# Altium PCB буектополгия.PcbDoc
Units mm, origin at the board's own origin, x right, y up, seen from the top; angles counter-clockwise.
Board outline 101.6 x 71.12 mm, 2 copper layers (Top Layer, Bottom Layer); 52 components, 34 nets, 194 pads, 24 vias.
Unrouted connection lines stored in the file: 126.
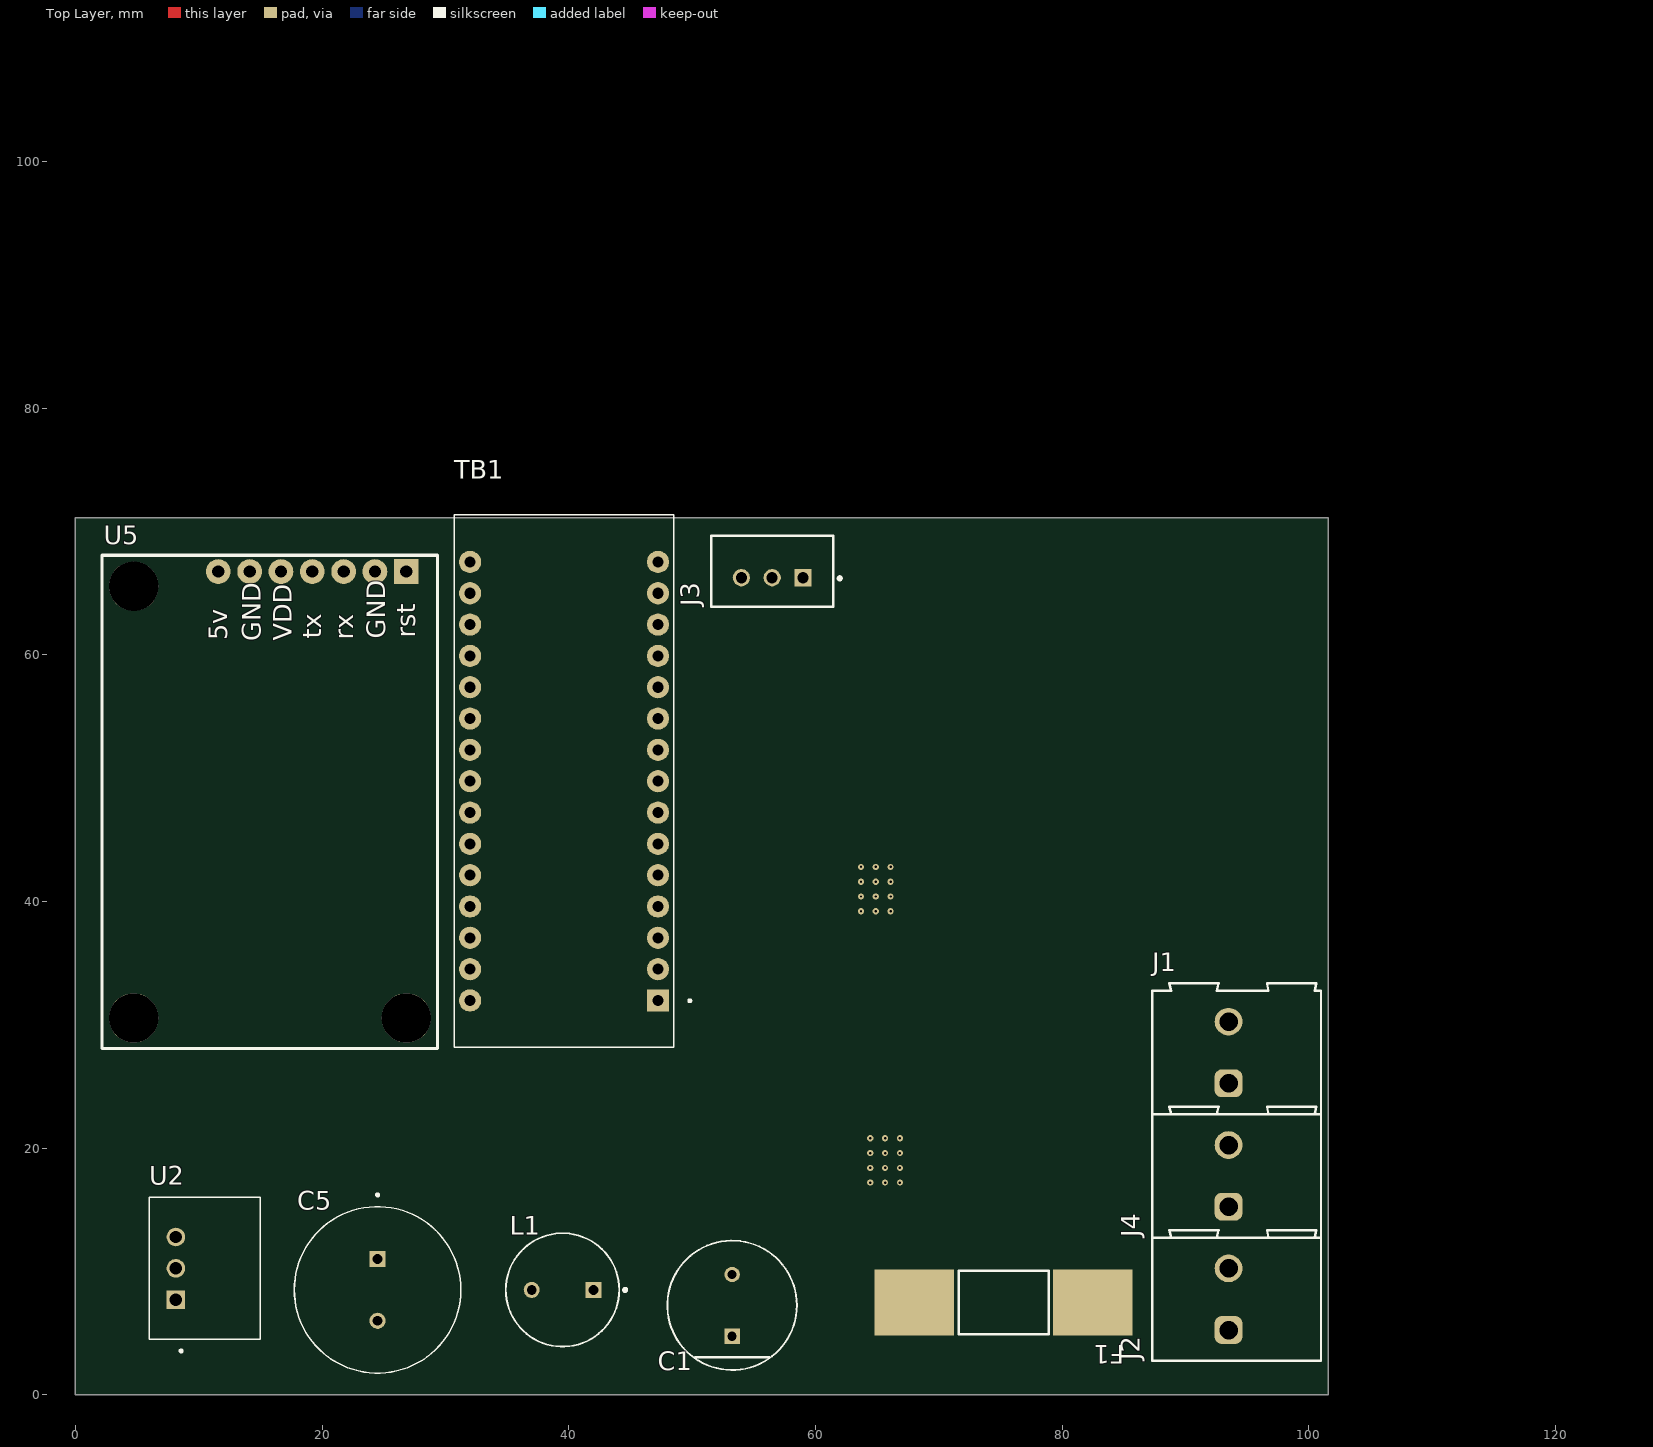
[diagram p0: Top Layer view]
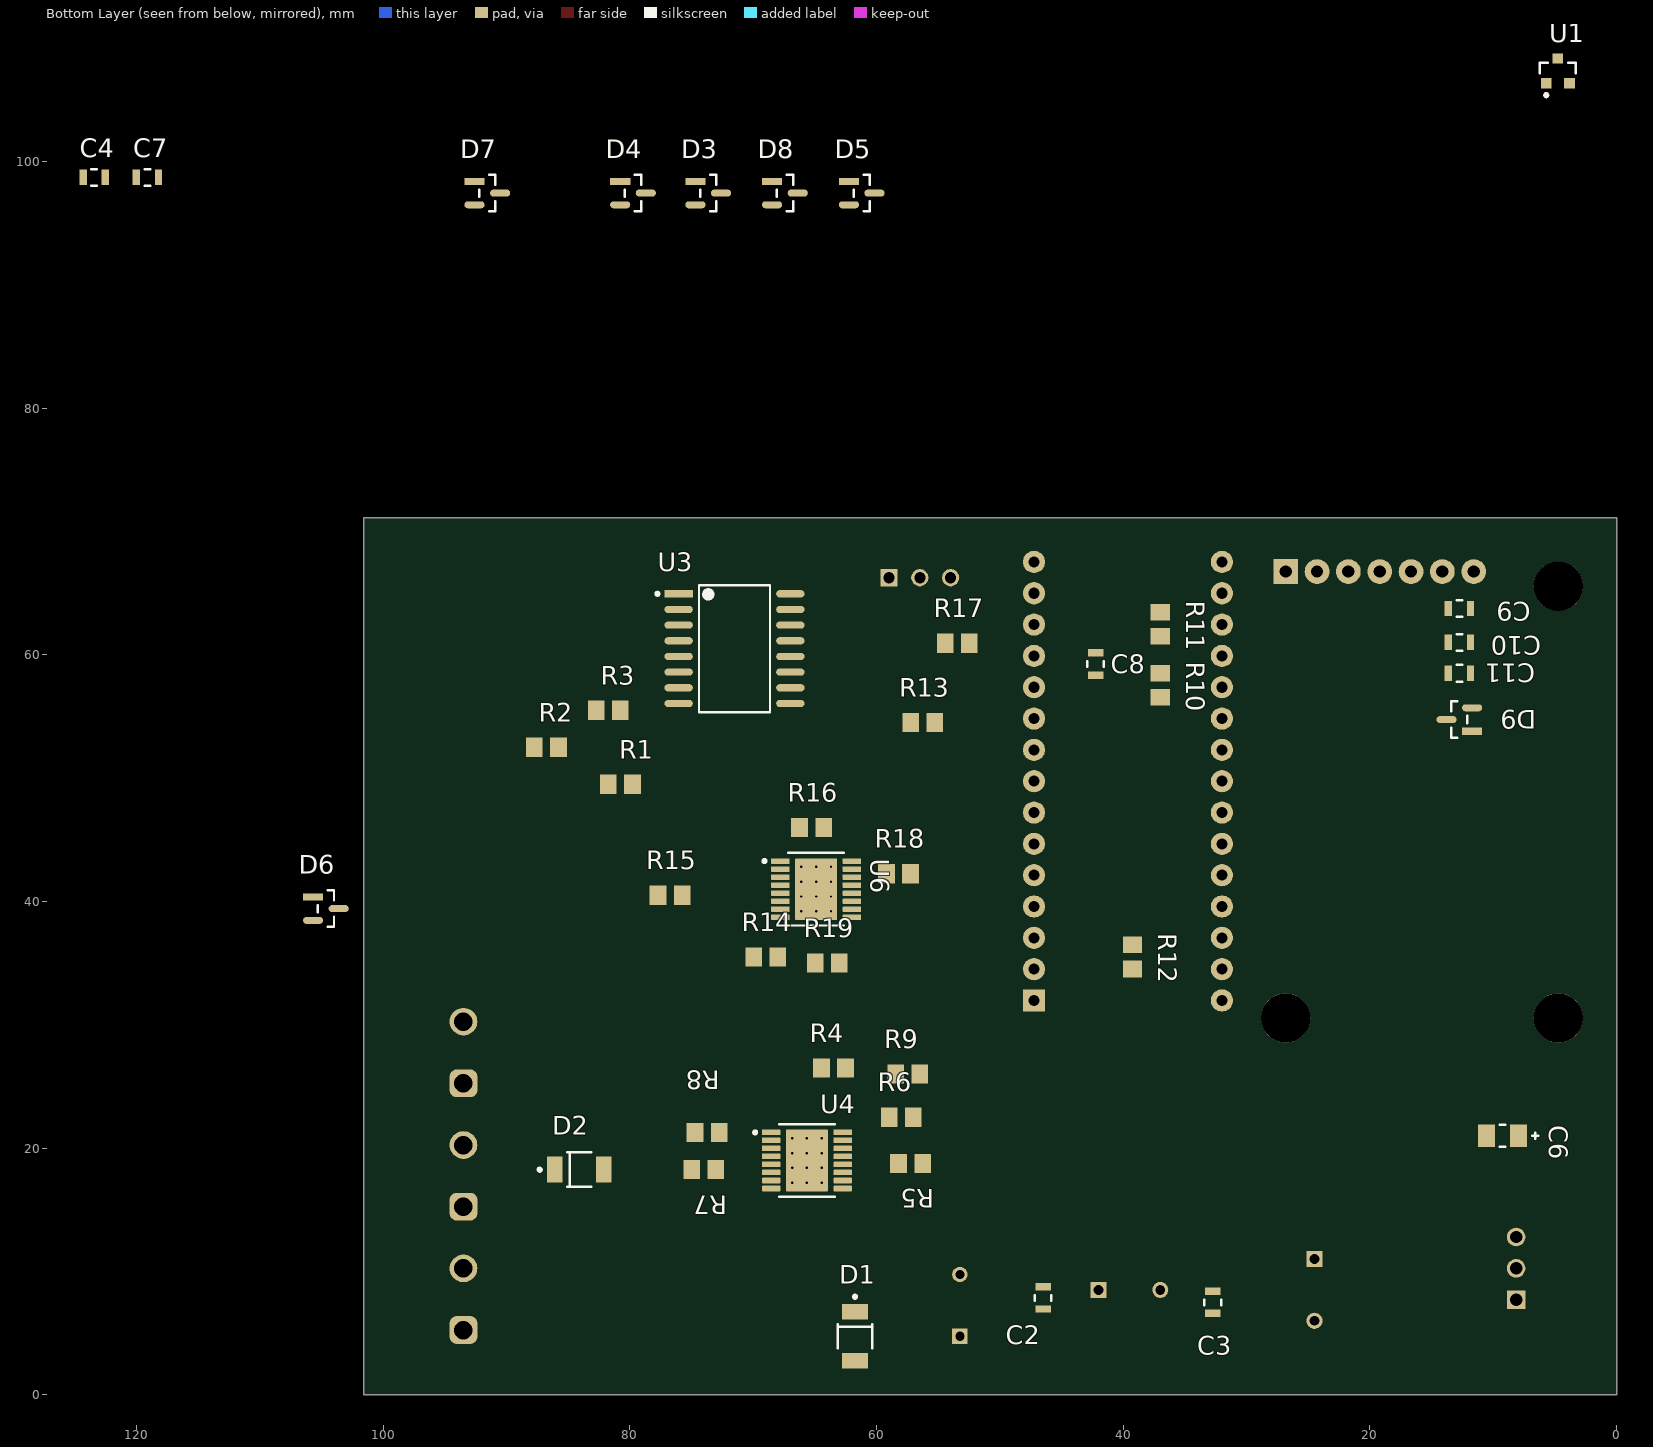
[diagram p1: Bottom Layer view, seen from below]

## Layer stack, top to bottom
Top Solder: solder mask 0.0102, Solder Resist, Dk 3.5
Top Layer: signal copper 0.0356
Dielectric 1: dielectric 0.32, FR-4, Dk 4.8
Bottom Layer: signal copper 0.0356
Bottom Solder: solder mask 0.0102, Solder Resist, Dk 3.5

## Board outline
0,0 0,71.12 101.6,71.12 101.6,0

## Design rules (kind name [scope] priority, off if disabled: settings)
Clearance [All] p1: gap=0.254 ignorepadtopadclearanceinfootprint=FALSE
PolygonConnect [All] p1: connectstyle=Relief reliefconductorwidth=0.254 reliefentries=4 polygonreliefangle="90 Angle" airgapwidth=0.254
RoutingVias [All] p1: holewidth=0.711 width=1.27 viastyle="Through Hole" minholewidth=0.711 minwidth=1.27 maxholewidth=0.711 maxwidth=1.27
SolderMaskExpansion [All] p1: expansion=0.102 istentingtop=FALSE
Width [All] p1: maxlimit=0.254 minlimit=0.254 preferedwidth=0.254
30 further rules are at their usual default settings.

## Components (designator, comment, footprint, x,y, rotation, side; value= is the part's Value field where it differs from the comment)
C1 "250PX33MEFC10X20" FP-250PX33MEFC10X20-MFG 53.25,7.25 r90 top
C2 "GRM21BR61C106KE15L" FP-GRM21B-0_1-MFG 46.5,7.85 r270 bottom
C3 "GRM21BR61C106KE15L" FP-GRM21B-0_1-MFG 32.75,7.5 r270 bottom
C4 "GRM21BR61C106KE15L" FP-GRM21B-0_1-MFG 123.444,98.708 r180 bottom
C5 "UBT1H331MHD8" CAPPRD500W60D1350H2200 24.5,8.5 r270 top value=680uF
C6 "TAJA226M006RNJ" FP-TAJA-MFG 9.25,21 r180 bottom
C7 "GRM21BR61C106KE15L" FP-GRM21B-0_1-MFG 119.126,98.708 r180 bottom
C8 "GRM21BR61C106KE15L" FP-GRM21B-0_1-MFG 42.25,59.25 r90 bottom
C9 "GRM21BR61C106KE15L" FP-GRM21B-0_1-MFG 12.75,63.75 r0 bottom
C10 "GRM21BR61C106KE15L" FP-GRM21B-0_1-MFG 12.75,61 r0 bottom
C11 "GRM21BR61C106KE15L" FP-GRM21B-0_1-MFG 12.75,58.5 r0 bottom
D1 "SMAJ15A" FP-SMA-MFG 61.75,4.75 r270 bottom
D2 "SMAJ12A" FP-SMA-MFG 84.12,18.25 r180 bottom
D3 "PESD5V2S2UT" FP-6_541-5014_01-4-IPC_A 73.66,97.438 r180 bottom value=35pF
D4 "PESD5V2S2UT" FP-6_541-5014_01-4-IPC_A 79.756,97.438 r180 bottom value=35pF
D5 "PESD5V2S2UT" FP-6_541-5014_01-4-IPC_A 61.214,97.438 r180 bottom value=35pF
D6 "PESD5V2S2UT" FP-6_541-5014_01-4-IPC_A 104.657,39.416 r180 bottom value=35pF
D7 "PESD5V2S2UT" FP-6_541-5014_01-4-IPC_A 91.567,97.438 r180 bottom value=35pF
D8 "PESD5V2S2UT" FP-6_541-5014_01-4-IPC_A 67.437,97.438 r180 bottom value=35pF
D9 "PESD5V2S2UT" FP-6_541-5014_01-4-IPC_A 12.75,54.75 r0 bottom value=35pF
F1 "021502.5MXP" LFUS-0215-20X5_L 75.26,7.493 r0 top
J1 "691211720002" 691211720002 94.15,27.75 r90 top
J2 "KSE-103-5.0-02P" 691211720002 94.15,7.75 r90 top
J3 "B3B-XH-A(LF)(SN)" FP-B3B-XH-A_LF_SN-MFG 56.5,66.775 r180 top
J4 "691211720002" 691211720002 94.15,17.75 r90 top
L1 "RLB0914-220KL" FP-RLB0914-MFG 39.5,8.5 r180 top
R1 "ERJ-6ENF1001V" RESC2013X70X40ML20T20 80.775,49.5 r0 bottom
R2 "ERJ-6ENF1001V" RESC2013X70X40ML20T20 86.775,52.5 r180 bottom
R3 "ERJ-6ENF1001V" RESC2013X70X40ML20T20 81.75,55.5 r180 bottom
R4 "ERJ-6ENF1001V" RESC2013X70X40ML20T20 63.5,26.5 r180 bottom
R5 "ERJ-6ENF1001V" RESC2013X70X40ML20T20 57.25,18.75 r0 bottom
R6 "ERJ-6ENF1001V" RESC2013X70X40ML20T20 58,22.5 r180 bottom
R7 "ERJ-6ENF1001V" RESC2013X70X40ML20T20 74.025,18.25 r0 bottom
R8 "ERJ-6ENF1001V" RESC2013X70X40ML20T20 73.75,21.25 r0 bottom
R9 "ERJ-6ENF1001V" RESC2013X70X40ML20T20 57.475,26 r180 bottom
R10 "ERJ-6ENF1001V" RESC2013X70X40ML20T20 37,57.525 r270 bottom
R11 "ERJ-6ENF1001V" RESC2013X70X40ML20T20 37,62.475 r270 bottom
R12 "ERJ-6ENF1001V" RESC2013X70X40ML20T20 39.25,35.5 r270 bottom
R13 "ERJ-6ENF1001V" RESC2013X70X40ML20T20 56.25,54.5 r180 bottom
R14 "ERJ-6ENF1001V" RESC2013X70X40ML20T20 69,35.5 r180 bottom
R15 "ERJ-6ENF1001V" RESC2013X70X40ML20T20 76.75,40.5 r180 bottom
R16 "ERJ-6ENF1001V" RESC2013X70X40ML20T20 65.275,46 r180 bottom
R17 "ERJ-6ENF1001V" RESC2013X70X40ML20T20 53.457,60.935 r180 bottom
R18 "ERJ-6ENF1001V" RESC2013X70X40ML20T20 58.225,42.25 r180 bottom
R19 "ERJ-6ENF1001V" RESC2013X70X40ML20T20 64,35 r180 bottom
TB1 "ARDUINO_NANO" SHIELD_ARDUINO_NANO 39.62,49.75 r180 top
U1 "PSM712-LF-T7" PRKT-SOT23-3_V 4.763,107.344 r90 bottom
U2 "P7805-500" CONV_P7805-500 10.5,10.25 r90 top
U3 "ADM2484EBRWZ-REEL7" FP-RW-16-IPC_B 71.525,60.5 r180 bottom
U4 "TPS1HB50-Q1" FP-PWP0016H-MFG 65.65,19 r180 bottom
U5 "sim800l" PCBComponent_1 26.83,30.555 r90 top
U6 "TPS1HB50-Q1" FP-PWP0016H-MFG 64.9,41 r180 bottom

## Footprints (in the part's own frame and the unit in brackets; to place one, negate y for a bottom-side part, rotate by r counter-clockwise, add the part's x,y. Pads: shape width x height; smd on the part's side, far side on the other; paste and mask are expansions set on the pad)
691211720002 [mm] "5,00mm - modular - green -45Ўг entry with rising cage clamp - 02p"
  rrect50% 2.25x2.25 hole 1.5: 1(-2.5,0.65)
  round 2.25 hole 1.5: 2(2.5,0.65)
  silkscreen extent -5,-6.85 5.6,6.85, body extent -5,-6.85 5.6,6.85, height 15.72
CAPPRD500W60D1350H2200 [mm]
  round 1.308 hole 0.8: N(2.5,0)
  rect 1.308x1.308 / inner round 1.308 / far side rect 1.308x1.308 hole 0.8: P(-2.5,0)
  silkscreen extent -7.8,-6.75 6.75,6.75, body extent -6.5,-6.25 6,6.25, height 22
CONV_P7805-500 [mm]
  rect 1.508x1.508 hole 1: 1(-2.54,2.35)
  round 1.508 hole 1: 2(0,2.35) 3(2.54,2.35)
  silkscreen extent -6.8,-4.5 5.75,4.5, body extent -5.71,-4.5 5.79,4.5, height 17.53
FP-6_541-5014_01-4-IPC_A [mm]
  rect 1.633x0.572 smd paste+0 mask+0: 1(-1.038,0.95)
  rrect100% 1.633x0.572 smd paste+0 mask+0: 2(-1.038,-0.95) 3(1.038,0)
  silkscreen extent -0.66,-1.48 0.66,1.48, body extent -1.24,-1.48 1.24,1.48, height 1.15
FP-250PX33MEFC10X20-MFG [mm]
  rect 1.25x1.25 hole 0.75 paste-2539.97 mask+0: 1(-2.5,0)
  round 1.25 hole 0.75 paste-2539.97 mask+0: 2(2.5,0)
  silkscreen extent -5.25,-5.25 5.25,5.25, body extent -5.35,-5.35 5.35,5.35, height 0.25
FP-B3B-XH-A_LF_SN-MFG [mm]
  rect 1.4x1.4 hole 0.9 paste-2539.97 mask+0: 1(-2.5,0.525)
  round 1.4 hole 0.9 paste-2539.97 mask+0: 2(0,0.525) 3(2.5,0.525)
  silkscreen extent -5.6,-2.88 4.95,2.88, body extent -5.05,-2.98 5.05,2.98, height 0.25
FP-GRM21B-0_1-MFG [mm]
  rect 0.6x1.25 smd paste+0 mask+0: 1(-0.9,0) 2(0.9,0)
  silkscreen extent -0.23,-0.67 0.23,0.67, body extent -1,-0.63 1,0.63, height 1.35
FP-PWP0016H-MFG [mm]
  rrect22% 1.5x0.45 smd paste+0 mask+0: 1(-2.9,2.275) 2(-2.9,1.625) 3(-2.9,0.975) 4(-2.9,0.325) 5(-2.9,-0.325) 6(-2.9,-0.975) 7(-2.9,-1.625) 8(-2.9,-2.275) 9(2.9,-2.275) 10(2.9,-1.625) 11(2.9,-0.975) 12(2.9,-0.325) 13(2.9,0.325) 14(2.9,0.975) 15(2.9,1.625) 16(2.9,2.275)
  rrect3% 3.4x5 smd paste-1000 mask-1000: 17(0,0)
  silkscreen extent -4.33,-2.95 2.25,2.95, body extent -3.2,-2.5 3.2,2.5, height 1.2
FP-RLB0914-MFG [mm]
  rect 1.3x1.3 hole 0.8 paste-2539.97 mask+0: 1(-2.5,0)
  round 1.3 hole 0.8 paste-2539.97 mask+0: 2(2.5,0)
  silkscreen extent -5.2,-4.6 4.6,4.6, body extent -4.7,-4.7 4.7,4.7, height 0.25
FP-RW-16-IPC_B [mm]
  rect 2.298x0.582 smd paste+0 mask+0: 1(-4.528,4.445)
  rrect100% 2.298x0.582 smd paste+0 mask+0: 2(-4.528,3.175) 3(-4.528,1.905) 4(-4.528,0.635) 5(-4.528,-0.635) 6(-4.528,-1.905) 7(-4.528,-3.175) 8(-4.528,-4.445) 9(4.528,-4.445) 10(4.528,-3.175) 11(4.528,-1.905) 12(4.528,-0.635) 13(4.528,0.635) 14(4.528,1.905) 15(4.528,3.175) 16(4.528,4.445)
  silkscreen extent -6.38,-5.15 2.88,5.15, body extent -5.18,-5.15 5.18,5.15, height 2.65
FP-SMA-MFG [mm]
  rect 1.27x2.1 smd paste+0 mask+0: 1(-1.985,0) 2(1.985,0)
  silkscreen extent -3.32,-1.4 0.97,1.4, body extent -2.61,-1.3 2.61,1.3, height 2.62
FP-TAJA-MFG [mm]
  rect 1.4x1.8 smd paste+0 mask+0: 1(-1.3,0) 2(1.3,0)
  silkscreen extent -0.23,-0.9 2.9,0.9, body extent -1.6,-0.8 1.6,0.8, height 1.8
LFUS-0215-20X5_L [mm] "MELF Resistor, 2-Leads, Body 20.5x5.3mm, IPC High Density"
  rect 6.45x5.35 smd: 1(-7.25,0) 2(7.25,0)
  silkscreen extent -3.65,-2.57 3.65,2.58, body extent -10,-2.58 10,2.58, height 5.15
PCBComponent_1 [mm]
  rect 2x2 hole 1: 1(36.195,0)
  round 2 hole 1: 2(36.195,2.54) 3(36.195,5.08) 4(36.195,7.62) 5(36.195,10.16) 6(36.195,12.7) 7(36.195,15.24)
  round 4 hole 4 unplated: 8(0,22.1) 8(0,0) 8(35,22.1)
  silkscreen extent -2.49,-2.54 37.51,24.66, body extent -2.54,-2.55 37.46,24.63, height 11
PRKT-SOT23-3_V [mm] "SOT23, 3-Leads, Body 2.92x1.3mm, Pitch 0.94mm"
  rect 0.84x0.84 smd: 1(-1,0.94) 3(1,0)
  rect 0.84x0.9 smd: 2(-1,-0.94)
  silkscreen extent -2.09,-1.46 0.65,1.46, body extent -0.65,-1.46 0.65,1.46, height 1.17
RESC2013X70X40ML20T20 [mm] "Chip Resistor, 2-Leads, Body 2.00x1.25mm, IPC Low Density"
  rect 1.35x1.55 smd: 1(-0.975,0) 2(0.975,0)
  body extent -1.1,-0.72 1.1,0.72, height 0.7
SHIELD_ARDUINO_NANO [mm]
  rect 1.8x1.8 / inner round 1.8 / far side rect 1.8x1.8 hole 0.9: 1(-7.62,17.78)
  round 1.8 hole 0.9: 2(-7.62,15.24) 3(-7.62,12.7) 4(-7.62,10.16) 5(-7.62,7.62) 6(-7.62,5.08) 7(-7.62,2.54) 8(-7.62,0) 9(-7.62,-2.54) 10(-7.62,-5.08) 11(-7.62,-7.62) 12(-7.62,-10.16) 13(-7.62,-12.7) 14(-7.62,-15.24) 15(-7.62,-17.78) 16(7.62,-17.78) 17(7.62,-15.24) 18(7.62,-12.7) 19(7.62,-10.16) 20(7.62,-7.62) 21(7.62,-5.08) 22(7.62,-2.54) 23(7.62,0) 24(7.62,2.54) 25(7.62,5.08) 26(7.62,7.62) 27(7.62,10.16) 28(7.62,12.7) 29(7.62,15.24) 30(7.62,17.78)
  silkscreen extent -10.3,-21.59 8.89,21.59, body extent -9,-21.6 9,23.4, height 12.6

## Part data
C1: library part CMP-01474-19991556-1, "250PX33MEFC10X20 Radial Can ALUMINUM ELECTROLYTIC CAPACITOR PX 250V 33muF ±20% 0.394Dia 10.00mm", Capacitance=100uF, Case/Package=Radial, Max Operating Temperature=105°C, Min Operating Temperature=-40°C, Ripple Current=140mA, Tolerance=20%, Voltage Rating=250V, Diameter=10mm, Dissipation Factor=20%, Height=20mm, Height - Seated (Max)=21.9964mm, Lead Pitch=5.0038mm, Length=63.5mm, Life (Hours)=2000hours, Mount="Through Hole", NexarPartId=19991556, Number of Pins=2, REACH SVHC="No SVHC", Ripple Current (AC)=140mA, RoHS=Compliant, Voltage Rating (DC)=250V, Weight=4.717361g, Width=19.05mm
C2 C3: library part CMP-2007-03453-2, "Chip Multilayer Ceramic Capacitors for General Purpose, 0805, 10uF, X5R, 15%, 10%, 16V", Capacitance=10uF, Case Code (Imperial)=0805, Case Code (Metric)=2012, Dielectric=X5R, Max Operating Temperature=85°C, Min Operating Temperature=-55°C, Package Quantity=1, Tolerance=10%, Voltage=16V, Case/Package=0805, Depth=1.25mm, Height=1.25mm, Lead Free="Lead Free", Length=2mm, Material=Ceramic, Mount="Surface Mount", Packaging="Tape and Reel", Radiation Hardening=No, REACH SVHC="No SVHC", Termination=SMD/SMT, Thickness=0.053inch, Voltage Rating=16V, Voltage Rating (DC)=16V, Width=1.25mm
C4 C7 C11: library part CMP-2007-03453-2, "Chip Multilayer Ceramic Capacitors for General Purpose, 0805, 0.1uF, X5R, 15%, 10%, 16V", Capacitance=0.1uF, Case Code (Imperial)=0805, Case Code (Metric)=2012, Dielectric=X5R, Max Operating Temperature=85°C, Min Operating Temperature=-55°C, Package Quantity=1, Tolerance=10%, Voltage=16V, Case/Package=0805, Depth=1.25mm, Height=1.25mm, Lead Free="Lead Free", Length=2mm, Material=Ceramic, Mount="Surface Mount", Packaging="Tape and Reel", Radiation Hardening=No, REACH SVHC="No SVHC", Termination=SMD/SMT, Thickness=0.053inch, Voltage Rating=16V, Voltage Rating (DC)=16V, Width=1.25mm
C5: "330 ÂµF 50 V Aluminum Electrolytic Capacitors Radial, Can - 10000 Hrs @ 125Â°C", Package="Radial Nichicon", Availability="In Stock", Check_prices=https://www.snapeda.com/parts/UBT1H331MHD8/Nichicon/view-part/?ref=eda, MF=Nichicon, MP=UBT1H331MHD8, PRICE=None, Purchase-URL=https://pricing.snapeda.com/search/part/UBT1H331MHD8/?ref=eda, SnapEDA_Link=https://www.snapeda.com/parts/UBT1H331MHD8/Nichicon/view-part/?ref=snap
C6: library part CMP-04424-000650-1, "22uF 6.3V  ±20% 3Ω 1206  SMD Tantalum Capacitor", Capacitance=22uF, Case Code (Imperial)=1206, Case Code (Metric)=3216, ESR (Equivalent Series Resistance)=3R, Leakage Current=1.4uA, Max Operating Temperature=125°C, Min Operating Temperature=-55°C, Package Quantity=1, Tolerance=20%, Voltage Rating=6.3V, Case/Package=1206, Construction=Flat, Depth=1.6mm, Dissipation Factor=6%, Features="General Purpose", Height=1.8mm, Height - Seated (Max)=0.071inch, Lead Free="Lead Free", Length=3.2mm, Mount="Surface Mount", Number of Pins=2, Packaging="Tape and Reel", Polarity=Polar, Radiation Hardening=No, REACH SVHC="No SVHC", RoHS Compliant=Yes, Series=TAJ, Termination=SMD/SMT, Voltage Rating (DC)=6.3V, Width=1.6mm
C8: library part CMP-2007-03453-2, "Chip Multilayer Ceramic Capacitors for General Purpose, 0805, 10uF, X5R, 15%, 10%, 16V", Capacitance=1uF, Case Code (Imperial)=0805, Case Code (Metric)=2012, Dielectric=X5R, Max Operating Temperature=85°C, Min Operating Temperature=-55°C, Package Quantity=1, Tolerance=10%, Voltage=16V, Case/Package=0805, Depth=1.25mm, Height=1.25mm, Lead Free="Lead Free", Length=2mm, Material=Ceramic, Mount="Surface Mount", Packaging="Tape and Reel", Radiation Hardening=No, REACH SVHC="No SVHC", Termination=SMD/SMT, Thickness=0.053inch, Voltage Rating=16V, Voltage Rating (DC)=16V, Width=1.25mm
C9: library part CMP-2007-03453-2, "Chip Multilayer Ceramic Capacitors for General Purpose, 0805, 10uF, X5R, 15%, 10%, 16V", Capacitance=33pF, Case Code (Imperial)=0805, Case Code (Metric)=2012, Dielectric=X5R, Max Operating Temperature=85°C, Min Operating Temperature=-55°C, Package Quantity=1, Tolerance=10%, Voltage=16V, Case/Package=0805, Depth=1.25mm, Height=1.25mm, Lead Free="Lead Free", Length=2mm, Material=Ceramic, Mount="Surface Mount", Packaging="Tape and Reel", Radiation Hardening=No, REACH SVHC="No SVHC", Termination=SMD/SMT, Thickness=0.053inch, Voltage Rating=16V, Voltage Rating (DC)=16V, Width=1.25mm
C10: library part CMP-2007-03453-2, "Chip Multilayer Ceramic Capacitors for General Purpose, 0805, 10uF, X5R, 15%, 10%, 16V", Capacitance=10pF, Case Code (Imperial)=0805, Case Code (Metric)=2012, Dielectric=X5R, Max Operating Temperature=85°C, Min Operating Temperature=-55°C, Package Quantity=1, Tolerance=10%, Voltage=16V, Case/Package=0805, Depth=1.25mm, Height=1.25mm, Lead Free="Lead Free", Length=2mm, Material=Ceramic, Mount="Surface Mount", Packaging="Tape and Reel", Radiation Hardening=No, REACH SVHC="No SVHC", Termination=SMD/SMT, Thickness=0.053inch, Voltage Rating=16V, Voltage Rating (DC)=16V, Width=1.25mm
D1: library part CMP-07401-000026-1, "TVS DIODE 15V 24.4V SMA", Breakdown Voltage=16.7V, Clamping Voltage=24.4V, Manufacturer="Bourns Inc.", Max Junction Temp=+150°C, Package=SMA, Peak Pulse Current=16.4A, Peak Pulse Power=400W, Reverse Standoff Voltage=15V, Temperature="-55°C to +150°C", Temperature Range Low=-55°C, Automotive=No, Category=Diode, ComponentLink2Description=Datasheet, ComponentLink2URL=https://www.bourns.com/docs/Product-Datasheets/SMAJ.pdf, Device Class L1="Circuit Protection", Device Class L2="TVS Diodes", Device Class L3=unset, Digikey Description="TVS DIODE 15V 24.4V SMA", Direction=Unidirectional, Height=2.29mm, Lead Free=Yes, Manufacturer Part Number=SMAJ15A, Mouser Description="Bourns Smaj15a / Diode Tvs 15v 400w Uni 5% Smd Bourns", Number of Channels=1, Octopart=https://octopart.com/smaj15a-bourns-12809353, RoHS=TRUE, Temperature Range High=+150°C
D2: library part CMP-07401-000026-1, "TVS DIODE 15V 24.4V SMA", Breakdown Voltage=16.7V, Clamping Voltage=24.4V, Manufacturer="Bourns Inc.", Manufacturer Part Number=SMAJ15A, Max Junction Temp=+150°C, Package=SMA, Peak Pulse Current=16.4A, Peak Pulse Power=400W, Reverse Standoff Voltage=15V, Temperature="-55°C to +150°C", Temperature Range Low=-55°C, Automotive=No, Category=Diode, ComponentLink2Description=Datasheet, ComponentLink2URL=https://www.bourns.com/docs/Product-Datasheets/SMAJ.pdf, Device Class L1="Circuit Protection", Device Class L2="TVS Diodes", Device Class L3=unset, Digikey Description="TVS DIODE 15V 24.4V SMA", Direction=Unidirectional, Height=2.29mm, Lead Free=Yes, Mouser Description="Bourns Smaj15a / Diode Tvs 15v 400w Uni 5% Smd Bourns", Number of Channels=1, Octopart=https://octopart.com/smaj15a-bourns-12809353, RoHS=TRUE, Temperature Range High=+150°C
D3 D4 D5 D6 D7 D8 D9: library part CMP-02577-000002-1, "TVS DIODE 5V  SOT23-3", Breakdown Voltage=16.5V, Capacitance=35pF, Clamping Voltage=24.8V, Manufacturer=Vishay, Manufacturer Part Number=GSOT15C-E3-08, Max Junction Temp=+150°C, Package=6.541-5014.01-4, Peak Pulse Current=8A, Peak Pulse Power=345W, Reverse Standoff Voltage=15V, Temperature="-55°C to +150°C", Temperature Range Low=-55°C, Automotive=Yes, Automotive Grade="Grade 0", Category=Diode, ComponentLink2Description=Datasheet, ComponentLink2URL=http://www.vishay.com/docs/85824/gsot03c.pdf, Device Class L1="Circuit Protection", Device Class L2="TVS Diodes", Device Class L3=unset, Digikey Description="TVS DIODE 15V 28.8V SOT23-3", Direction=Unidirectional, Height=1.15mm, Lead Free=Yes, Mouser Description="GSOT15C Series 12.3 V 120 pF SMT Bi-Directional ESD Protection Diode - SOT-23", Number of Channels=2, Octopart=https://octopart.com/gsot15c-e3-08-vishay-46467627, RoHS=TRUE, Temperature Range High=+150°C
F1: library part CMP-2000-05620-1, "Time-Lag Type Cartridge Fuse, 1 A, 0.00386 Ohm, 250 V, -55 to 125 degC, 2-Pin SMD, RoHS, Bulk d5*20", Current Rating=1A, Manufacturer=Littelfuse, Operating Temp Range=-55to+125°C, Package Description="2-Pin Surface Mount Device, Body 20 x 5.15 mm", Package Reference=0215-20X5, Working Voltage-Max=250V, Datasheet URL=http://www.littelfuse.com/~/media/electronics/datasheets/fuses/littelfuse_fuse_215_datasheet.pdf.pdf, Datasheet Version=05/2016, Manufacturer URL=http://www.littelfuse.com/, Mounting Technology=SurfaceMount, Response Characteristic=TimeLag, Size=5x20mm
J1 J2 J4: library part CMP-1502-02524-2, Color=Green, Current=10A, Max Operating Temperature=105°C, Min Operating Temperature=-40°C, Voltage=300V, Connector Type="PCB, Terminal Block", Contact Material=Brass, Contact Plating=Tin, Height=15.5mm, Housing Material=Nylon, Lead Pitch=5mm, Length=13.7mm, Mount="Through Hole", NexarPartId=8917714, Number of Contacts=2, Number of Levels=1, Number of Pins=2, Number of Positions Per Level=2, Packaging=Box, Pitch=5.0038mm, Plating="Brass, Steel", REACH SVHC=Unknown, RoHS=Compliant, Stripping Length=-7mm, Termination=Screw, Width=10mm, Wire Gauge (Max)=24AWG, Wire Gauge (Min)=12AWG, Wire/Cable Gauge=12AWG
J3: library part CMP-17439-000014-3, "CONN HEADER VERT 3POS 2.5MM", Color=Natural, Contact Resistance=20mR, Current Rating=3A, Flammability Rating="UL94 V-0", Housing Color=White, Insulation Resistance=1GR, Max Operating Temperature=85°C, Max Voltage Rating (AC)=250V, Min Operating Temperature=-25°C, Connector Type=Header, Contact Finish - Mating=TIN, Contact Material=Brass, Contact Plating=Tin, Contact Shape=Square, Contact Type="Male Pin", Depth=5.75mm, Fastening Type=Detent, Gender=Male, Housing Material=Polyamide, Insulation Color=Natural, Insulation Material=Nylon, Lead Free="Lead Free", Lead Pitch=2.5mm, Length=9.9mm, Max Current Rating=3A, Max Voltage Rating (DC)=250V, Mount="Through Hole", Number of Contacts=3, Number of Positions=3, Number of Rows=1, Orientation=Straight, Packaging=Bulk, Pitch=2.5mm, REACH SVHC="No SVHC", Series=XH, Termination=Solder, Voltage Rating=250V, Voltage Rating (AC)=250V, Wire/Cable Gauge=22AWG
L1: library part CMP-07248-000080-1, "FIXED IND 22UH 1.9A 90 MOHM TH", Case/Package=Radial, Current Rating=1A, DC Resistance (DCR)=280mR, Inductance=22uH, Inductance Tolerance=10%, Max Operating Temperature=105°C, Min Operating Temperature=-20°C, Package Quantity=200, Resistor Type=Wirewound, Self Resonant Frequency=3.5MHz, Test Frequency=796kHz, Core Material=Ferrite, DC Current=1A, Diameter=8.7mm, Height=12mm, Height - Seated (Max)=0.512inch, Lead Diameter=0.65mm, Lead Pitch=5mm, Lead/Base Style=Radial, Length=12mm, Material=Steel, Max DC Current=1A, Military Standard=Not, Mount="Through Hole", Orientation=Vertical, Packaging=Bulk, Q Factor=30, Radiation Hardening=No, REACH SVHC="No SVHC", Resistance=280mR, RMS Current (Irms)=1A, Series=RLB, Shielding=Unshielded, Termination=Radial, Tolerance=10%
R1 R2: library part CMP-2001-04375-5, "Chip Resistor, 12 Ohm, +/- 1%, 0.125 W, -55 to 155 degC, 0805 (2012 Metric), RoHS, Tape and Reel", Manufacturer=Panasonic, Max Operating Temperature="155 degC", Min Operating Temperature="-55 degC", Package Quantity=1, Resistance="12 Ом", Voltage Rating="150 V", ComponentLink1Description="Manufacturer URL", ComponentLink1URL=http://www.panasonic.com/, ComponentLink2Description=Datasheet, ComponentLink2URL=http://industrial.panasonic.com/cdbs/www-data/pdf/RDA0000/AOA0000C86.pdf, DatasheetVersion=04/2015, Height="0.6 mm", Length="2 mm", Mount="Surface Mount", Mounting Technology="Surface Mount", PackageDescription="2-Pin Surface Mount Device, Body 2 x 1.25 mm", PackageReference=0805, Packaging="Cut Tape", REACH SVHC=Yes
R3: library part CMP-2001-04375-5, "Chip Resistor, 120Ohm, +/- 1%, 0.125 W, -55 to 155 degC, 0805 (2012 Metric), RoHS, Tape and Reel", Manufacturer=Panasonic, Max Operating Temperature="155 degC", Min Operating Temperature="-55 degC", Package Quantity=1, Resistance="120 Ом", Voltage Rating="150 V", ComponentLink1Description="Manufacturer URL", ComponentLink1URL=http://www.panasonic.com/, ComponentLink2Description=Datasheet, ComponentLink2URL=http://industrial.panasonic.com/cdbs/www-data/pdf/RDA0000/AOA0000C86.pdf, DatasheetVersion=04/2015, Height="0.6 mm", Length="2 mm", Mount="Surface Mount", Mounting Technology="Surface Mount", PackageDescription="2-Pin Surface Mount Device, Body 2 x 1.25 mm", PackageReference=0805, Packaging="Cut Tape", REACH SVHC=Yes
R4 R18: library part CMP-2001-04375-5, "Chip Resistor, 12 Ohm, +/- 1%, 0.125 W, -55 to 155 degC, 0805 (2012 Metric), RoHS, Tape and Reel", Manufacturer=Panasonic, Max Operating Temperature="155 degC", Min Operating Temperature="-55 degC", Package Quantity=1, Resistance="1 кОм", Voltage Rating="150 V", ComponentLink1Description="Manufacturer URL", ComponentLink1URL=http://www.panasonic.com/, ComponentLink2Description=Datasheet, ComponentLink2URL=http://industrial.panasonic.com/cdbs/www-data/pdf/RDA0000/AOA0000C86.pdf, DatasheetVersion=04/2015, Height="0.6 mm", Length="2 mm", Mount="Surface Mount", Mounting Technology="Surface Mount", PackageDescription="2-Pin Surface Mount Device, Body 2 x 1.25 mm", PackageReference=0805, Packaging="Cut Tape", REACH SVHC=Yes
R5: library part CMP-2001-04375-5, "Chip Resistor, 12 Ohm, +/- 1%, 0.125 W, -55 to 155 degC, 0805 (2012 Metric), RoHS, Tape and Reel", Manufacturer=Panasonic, Max Operating Temperature="155 degC", Min Operating Temperature="-55 degC", Package Quantity=1, Resistance="47 кОм", Voltage Rating="150 V", ComponentLink1Description="Manufacturer URL", ComponentLink1URL=http://www.panasonic.com/, ComponentLink2Description=Datasheet, ComponentLink2URL=http://industrial.panasonic.com/cdbs/www-data/pdf/RDA0000/AOA0000C86.pdf, DatasheetVersion=04/2015, Height="0.6 mm", Length="2 mm", Mount="Surface Mount", Mounting Technology="Surface Mount", PackageDescription="2-Pin Surface Mount Device, Body 2 x 1.25 mm", PackageReference=0805, Packaging="Cut Tape", REACH SVHC=Yes
R6 R7 R8 R9 R13 R14 R15 R16 R19: library part CMP-2001-04375-5, "Chip Resistor, 12 Ohm, +/- 1%, 0.125 W, -55 to 155 degC, 0805 (2012 Metric), RoHS, Tape and Reel", Manufacturer=Panasonic, Max Operating Temperature="155 degC", Min Operating Temperature="-55 degC", Package Quantity=1, Resistance="15 кОм", Voltage Rating="150 V", ComponentLink1Description="Manufacturer URL", ComponentLink1URL=http://www.panasonic.com/, ComponentLink2Description=Datasheet, ComponentLink2URL=http://industrial.panasonic.com/cdbs/www-data/pdf/RDA0000/AOA0000C86.pdf, DatasheetVersion=04/2015, Height="0.6 mm", Length="2 mm", Mount="Surface Mount", Mounting Technology="Surface Mount", PackageDescription="2-Pin Surface Mount Device, Body 2 x 1.25 mm", PackageReference=0805, Packaging="Cut Tape", REACH SVHC=Yes
R10: library part CMP-2001-04375-5, "Chip Resistor, 12 Ohm, +/- 1%, 0.125 W, -55 to 155 degC, 0805 (2012 Metric), RoHS, Tape and Reel", Manufacturer=Panasonic, Max Operating Temperature="155 degC", Min Operating Temperature="-55 degC", Package Quantity=1, Resistance="18 кОм", Voltage Rating="150 V", ComponentLink1Description="Manufacturer URL", ComponentLink1URL=http://www.panasonic.com/, ComponentLink2Description=Datasheet, ComponentLink2URL=http://industrial.panasonic.com/cdbs/www-data/pdf/RDA0000/AOA0000C86.pdf, DatasheetVersion=04/2015, Height="0.6 mm", Length="2 mm", Mount="Surface Mount", Mounting Technology="Surface Mount", PackageDescription="2-Pin Surface Mount Device, Body 2 x 1.25 mm", PackageReference=0805, Packaging="Cut Tape", REACH SVHC=Yes
R11 R12: library part CMP-2001-04375-5, "Chip Resistor, 12 Ohm, +/- 1%, 0.125 W, -55 to 155 degC, 0805 (2012 Metric), RoHS, Tape and Reel", Manufacturer=Panasonic, Max Operating Temperature="155 degC", Min Operating Temperature="-55 degC", Package Quantity=1, Resistance="10 кОм", Voltage Rating="150 V", ComponentLink1Description="Manufacturer URL", ComponentLink1URL=http://www.panasonic.com/, ComponentLink2Description=Datasheet, ComponentLink2URL=http://industrial.panasonic.com/cdbs/www-data/pdf/RDA0000/AOA0000C86.pdf, DatasheetVersion=04/2015, Height="0.6 mm", Length="2 mm", Mount="Surface Mount", Mounting Technology="Surface Mount", PackageDescription="2-Pin Surface Mount Device, Body 2 x 1.25 mm", PackageReference=0805, Packaging="Cut Tape", REACH SVHC=Yes
R17: library part CMP-2001-04375-5, "Chip Resistor, 12 Ohm, +/- 1%, 0.125 W, -55 to 155 degC, 0805 (2012 Metric), RoHS, Tape and Reel", Manufacturer=Panasonic, Max Operating Temperature="155 degC", Min Operating Temperature="-55 degC", Package Quantity=1, Resistance="4.7 кОм", Voltage Rating="150 V", ComponentLink1Description="Manufacturer URL", ComponentLink1URL=http://www.panasonic.com/, ComponentLink2Description=Datasheet, ComponentLink2URL=http://industrial.panasonic.com/cdbs/www-data/pdf/RDA0000/AOA0000C86.pdf, DatasheetVersion=04/2015, Height="0.6 mm", Length="2 mm", Mount="Surface Mount", Mounting Technology="Surface Mount", PackageDescription="2-Pin Surface Mount Device, Body 2 x 1.25 mm", PackageReference=0805, Packaging="Cut Tape", REACH SVHC=Yes
TB1: "Small, complete, and breadboard-friendly board based on the ATmega328 (Arduino Nano 3.x)", Package="Non-Standard Arduino", Availability="Not in stock", Check_prices=https://www.snapeda.com/parts/Arduino%20Nano/Arduino/view-part/?ref=eda, MF=Arduino, MP="Arduino Nano", PRICE=None, SnapEDA_Link=https://www.snapeda.com/parts/Arduino%20Nano/Arduino/view-part/?ref=snap
U1: library part CMP-2000-07553-1, "TVS Array - Asymmetrical Data Line Protector, 600 W, 7.5 V, -55 to 150 degC, 3-Pin SOT23, RoHS, Tape and Reel", Capacitance=75pF, Case\/Package=SOT-23, Clamping Voltage=17V, Current=20uA, Manufacturer="Protek Devices", Max Operating Temperature=150degC, Min Breakdown Voltage=7.5V, Min Operating Temperature=-55degC, Package Description="3-Pin Small Outline Transistor, Body 2.92 x 1.3 mm, Pitch 0.94 mm", Package Reference=SOT23-3, Power Dissipation=600W, Voltage=12V, Working Voltage=7V, Datasheet URL=www.protekdevices.com/xyz/documents/datasheets/psm712.pdf, Datasheet Version=10/2013, Depth=1.4mm, Direction=Bidirectional, Element Configuration=Dual, Lead Free=LeadFree, Leakage Current=20uA, Length=3.04mm, Manufacturer URL=http://www.protekdevices.com/, Mounting Technology=SurfaceMount, Number of Pins=3, Packaging=TapeandReel, Radiation Hardening=No, RoHSCompliant=True
U2: Package=None, Availability=Unavailable, MP=P7805-500, PRICE=None
U3: library part CMP-09096-000197-1, "DGTL ISO 5KV RS422/RS485 16SOIC", Case/Package=SOIC, Isolated Power=No, Isolation Voltage=5kV, Max Operating Temperature=85°C, Max Supply Voltage=5.5V, Min Dual Supply Voltage=3V, Min Operating Temperature=-40°C, Nominal Supply Current=2mA, Package Quantity=400, Channel Type=Unidirectional, Data Rate=500Kbps, Height=2.35mm, Lead Free="Contains Lead", Length=10.5mm, Logic Function=Transceiver, Min Supply Voltage=3V, Mount="Surface Mount", Number of Channels=3, Number of Pins=16, Number of Receivers=1, Number of Transceivers=1, Number of Transmitters=1, Operating Supply Current=2mA, Operating Supply Voltage=3V, Packaging="Tape and Reel", RoHS Compliant=Yes, Series=-, Simplex/Duplex="Full Duplex", Supply Current=2mA, Width=7.6mm
U4 U6: "40-V, 50-mΩ Single-Channel Automotive Smart High-Side Switch", Manufacturer="Texas Instruments", Manufacturer Part Number=TPS26600PWPT, Max Junction Temp=+125°C, Max Supply Voltage=60V, Min Supply Voltage=4.2V, Nominal Supply Current=300uA, On State Resistance=150mΩ, Package=PWP0016H, Temperature="-40°C to +125°C", Temperature Range Low=-40°C, Automotive=No, Category=IC, ComponentLink2Description=Datasheet, ComponentLink2URL=http://www.ti.com/lit/ds/symlink/tps2660.pdf, Device Class L1="Integrated Circuits (ICs)", Device Class L2="Power Management ICs", Device Class L3="Hot Swap Controllers", Digikey Description="IC PWR MGMT EFUSE 60V 16HTSSOP", Height=1.2mm, Lead Free=Yes, Mouser Description="TEXAS INSTRUMENTS - TPS26600PWPT - HOT-SWAP CONTROLLER, 55V, HTSSOP-16", Number of Channels=1, Number Of Outputs=1, Octopart=https://octopart.com/tps26600pwpt-texas+instruments-75302672, RoHS=TRUE, Standoff Height=0.05mm, Temperature Range High=+125°C

## Via types
v1: diameter 0.5, hole 0.2, Top Layer to Bottom Layer, 24 vias

## Nets (pads, with @x,y where several pads share a name; then routed paths per layer and width w, separated by ;. In a path a pad name is that pad's centre, name@x,y a point inside that pad or via, vN(x,y) a via of type N, cw(c..) or ccw(c..) an arc to the next point about the centre after c; other vN are vias at no path point)
+5: C6.2 D6.1 D6.2 R12.2 TB1.27 U2.3 U3.1 U3.16 U6.17
  other v1: 63.7,39.2 64.9,39.2 66.1,39.2 63.7,40.4 64.9,40.4 66.1,40.4 63.7,41.6 64.9,41.6 66.1,41.6 63.7,42.8 64.9,42.8 66.1,42.8
"+5 sw": C4.1 C7.1 C9.1 C10.1 C11.1 D9.1 D9.2 J4.1 U5.7 U6.6 U6.7 U6.8
+12: C1.2 C2.1 C8.1 D1.1 F1.2 L1.1 R5.2 R10.2 R19.2 U4.17
  other v1: 64.45,17.2 65.65,17.2 66.85,17.2 64.45,18.4 65.65,18.4 66.85,18.4 64.45,19.6 65.65,19.6 66.85,19.6 64.45,20.8 65.65,20.8 66.85,20.8
"+12 sw": D2.1 U4.6 U4.7 U4.8
ds_pwr: D8.1 J3.1 R17.2 TB1.5
GND: C1.1 C2.2 C3.2 C4.2 C5.N C6.1 C7.2 C8.2 C9.2 C10.2 C11.2 D1.2 D2.2 D3.3 D4.3 D5.3 D6.3 D7.3 D8.3 D9.3 J2.1 J3.3 J4.2 R4.2 R6.1 R7.1 R8.1 R11.1 R14.1 R15.1 R16.1 R18.2 TB1.4 TB1.29 U1.3 U2.2 U3.2 U3.8 U3.9 U3.15 U4.1 U5.2 U5.6 U6.1
NetC3_1: C3.1 C5.P L1.2 U2.1
NetD3_2: D3.2 TB1.6 U3.3
NetD4_1: D4.1 TB1.7 U3.4 U3.5
NetD4_2: D4.2 TB1.8 U3.6
NetD5_1: D5.1 R13.1 TB1.10
NetD5_2: D5.2 R9.1 TB1.9
NetD7_1: D7.1 TB1.14 U5.4
NetD7_2: D7.2 TB1.13 U5.3
NetD8_2: D8.2 J3.2 R17.1 TB1.11
NetF1_1: F1.1 J2.2
NetJ1_1: J1.1 R1.1 U1.1
NetJ1_2: J1.2 R2.1 U1.2
NetR1_2: R1.2 R3.2 U3.12 U3.13
NetR2_2: R2.2 R3.1 U3.11 U3.14
NetR4_1: R4.1 U4.2
NetR5_1: R5.1 U4.5
NetR6_2: R6.2 U4.3
NetR7_2: R7.2 U4.14
NetR8_2: R8.2 U4.16
NetR9_2: R9.2 U4.4
NetR10_1: R10.1 R11.2 TB1.19
NetR13_2: R13.2 U6.4
NetR14_2: R14.2 U6.3
NetR15_2: R15.2 U6.14
NetR16_2: R16.2 U6.16
NetR18_1: R18.1 U6.2
NetR19_1: R19.1 U6.5
reset: R12.1 TB1.3 TB1.12 TB1.28
pads on no net: D3.1 TB1.1 TB1.2 TB1.15 TB1.16 TB1.17 TB1.18 TB1.20 TB1.21 TB1.22 TB1.23 TB1.24 TB1.25 TB1.26 TB1.30 U3.7 U3.10 U4.9 U4.10 U4.11 U4.12 U4.13 U4.15 U5.1 U5.5 U5.8 U6.9 U6.10 U6.11 U6.12 U6.13 U6.15

## Silkscreen, mask and mechanical layers (free items; w line width, h text height)
Mechanical 1:
  lines w0.254: 54.75,0 55.25,0 ; 0,0 101.6,0 101.6,71.12 0,71.12 0,0

## Text inside footprints (layer, text, board x,y; h text height)
U5: Top Overlay "5v" at 12.319,61.189 h1.52 r90; Top Overlay "rst" at 27.567,61.365 h1.52 r90; Top Overlay "GND" at 25.128,61.289 h1.52 r90; Top Overlay "rx" at 22.512,61.238 h1.52 r90; Top Overlay "tx" at 19.947,61.289 h1.52 r90; Top Overlay "VDD" at 17.551,61.138 h1.52 r90; Top Overlay "GND" at 15.011,61.112 h1.52 r90